# Altium PCB Mic Speaker Interconnect.PcbDoc
Units mm, origin at the board's own origin, x right, y up, seen from the top; angles counter-clockwise.
Board outline 17.6 x 15.81 mm, 2 copper layers (Top Layer, Bottom Layer), stack 1.621 mm thick; 8 components, 6 nets, 18 pads, 8 vias.
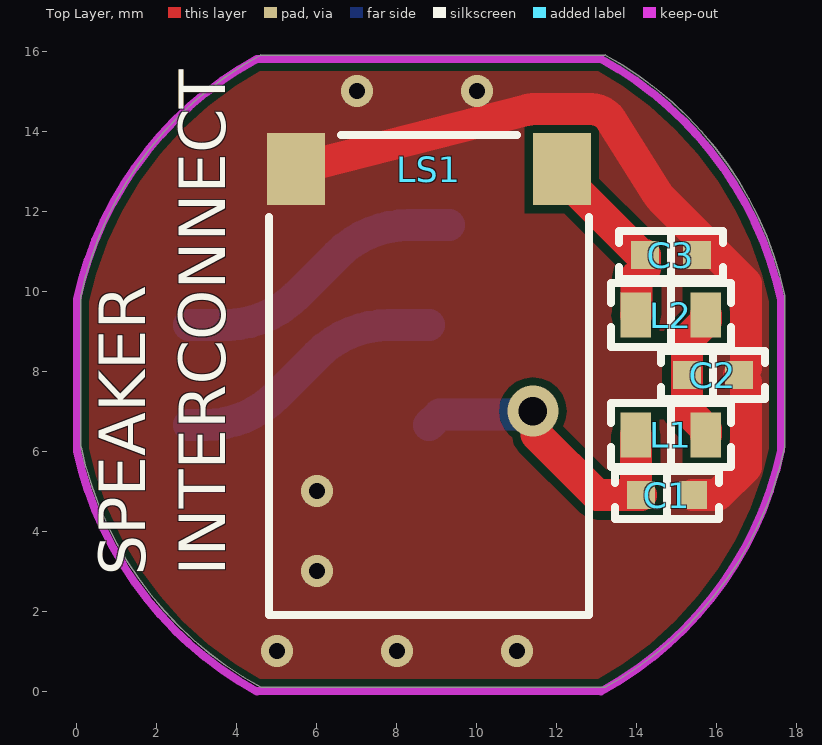
[diagram p0: Top Layer view]
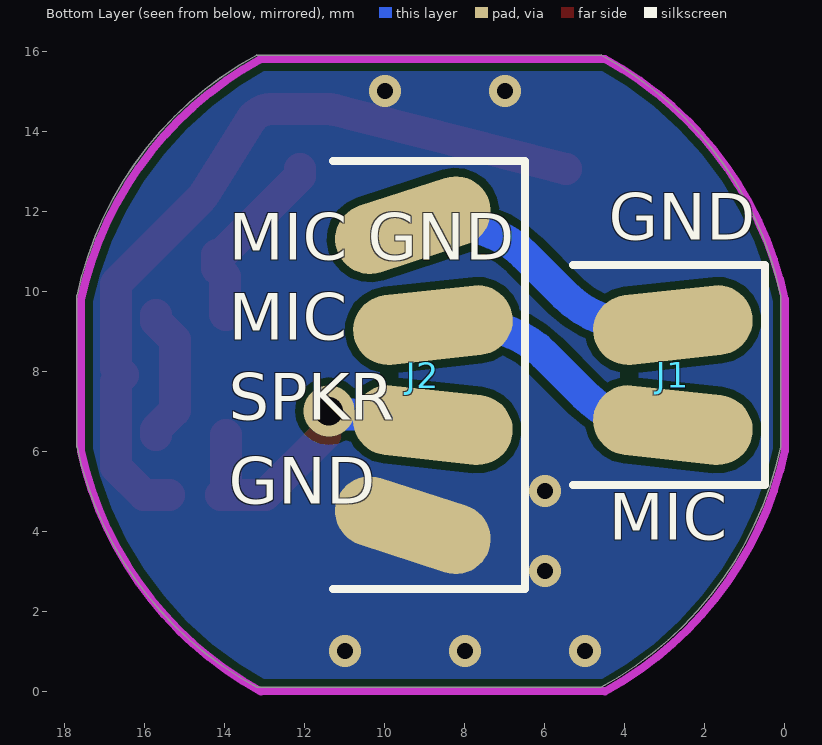
[diagram p1: Bottom Layer view, seen from below]
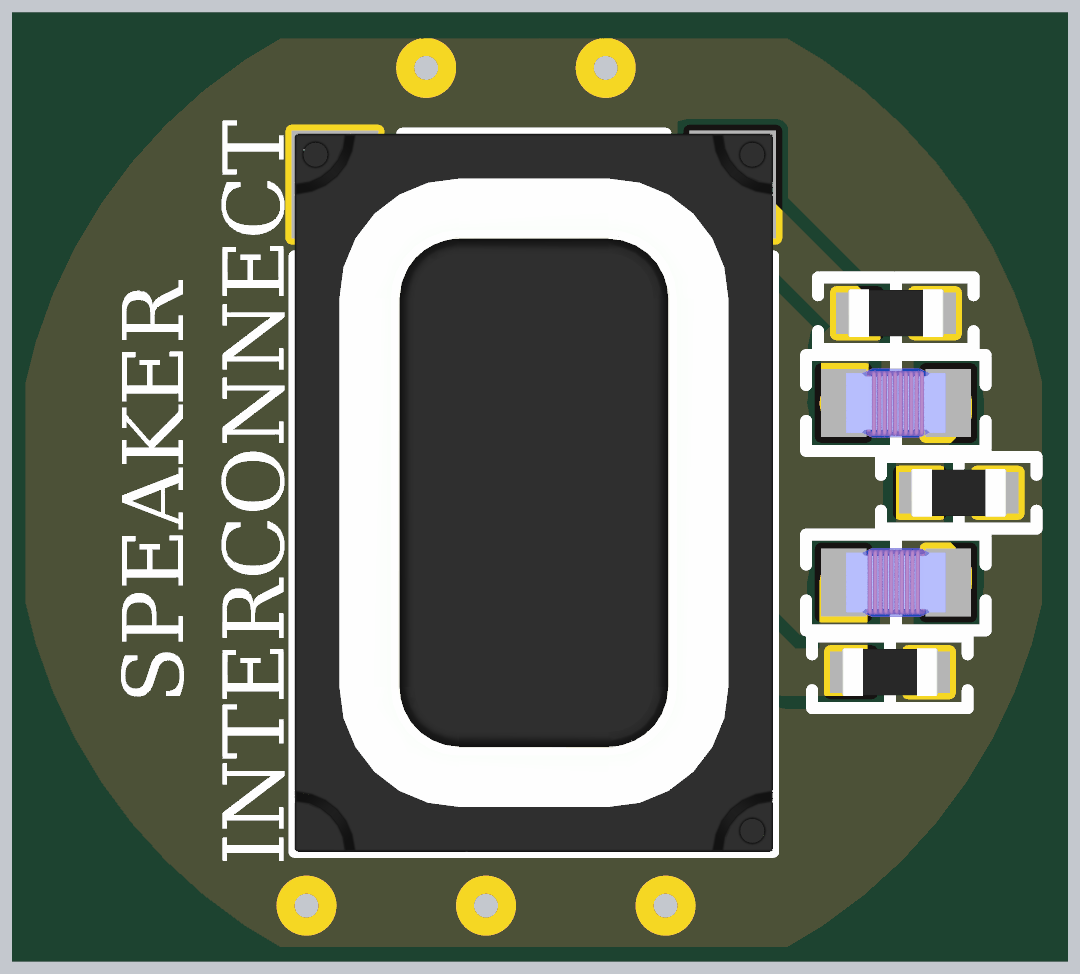
[diagram p2: 3D render of the assembled board from above, using the file's embedded part models]

## Layer stack, top to bottom
Top Solder: solder mask 0.0102, Solder Resist, Dk 3.5
Top Layer: signal copper 0.0356
Dielectric1: core 1.55, FR-4, Dk 4.8
Bottom Layer: signal copper 0.0356
Bottom Solder: solder mask 0.0102, Solder Resist, Dk 3.5

## Board outline
4.597,0.095 cw(c8.9,8) 0.103,6.101 0.1,6.1 0.1,9.9 0.103,9.899 cw(c8.9,8) 4.597,15.905 4.6,15.9 13.2,15.9 13.203,15.905 cw(c8.9,8) 17.697,9.899 17.7,9.9 17.7,6.1 17.697,6.101 cw(c8.9,8) 13.203,0.095 13.2,0.1

## Design rules (kind name [scope] priority, off if disabled: settings)
Clearance PadClearance [IsPad vs IsPad] p1: gap=0.2 ignorepadtopadclearanceinfootprint=FALSE except(0: Arc-Hole Track-Hole SMDPad-Hole THPad-Hole Via-Hole Fill-Hole Poly-Hole Region-Hole Text-Hole)
Clearance [All] p2: gap=0.2 ignorepadtopadclearanceinfootprint=FALSE except(0: Arc-Hole Track-Hole SMDPad-Hole THPad-Hole Via-Hole Fill-Hole Poly-Hole Region-Hole Text-Hole)
ComponentClearance [All] p1: gap=0.15 collisioncheckmode=3 verticalgap=0.254 showdistances=TRUE
HoleSize [All] p1: absolutevalues=TRUE maxlimit=6 minlimit=0.4 maxpercent=80.000 minpercent=20.000
HoleToHoleClearance [All] p1: gap=0.2 allowstackedmicrovias=TRUE
MinimumSolderMaskSliver [All] p1: minsoldermaskwidth=0
PolygonConnect ViaConnect [IsVia] p1: connectstyle=Direct reliefconductorwidth=0.254 reliefentries=4 polygonreliefangle="90 Angle" airgapwidth=0.254
PolygonConnect [All] p2: connectstyle=Direct reliefconductorwidth=0.3 reliefentries=4 polygonreliefangle="90 Angle" airgapwidth=0.254
RoutingVias [All] p1: holewidth=0.6 width=1 viastyle="Through Hole" minholewidth=0.4 minwidth=0.8 maxholewidth=5 maxwidth=6
SilkToSilkClearance [All] p1: silktosilkclearance=0
SilkToSolderMaskClearance SilkscreenOverComponentPads [IsPad] p1: minsilkscreentomaskgap=0.05 clearancetoexposedcopper=TRUE
SolderMaskExpansion "Via Tenting" [IsVia] p1: expansion=-2 istentingtop=FALSE
SolderMaskExpansion [All] p2: expansion=0.102 istentingtop=FALSE
Width [All] p1: maxlimit=2 minlimit=0.2 preferedwidth=0.4
24 further rules are at their usual default settings.

## Components (designator, comment, footprint, x,y, rotation, side; value= is the part's Value field where it differs from the comment)
C1 "680pF" "CAP FILM 0603_1608" 14.75,4.9 r180 top
C2 "560pF" "CAP FILM 0603_1608" 15.9,7.9 r180 top
C3 "120pF" "CAP FILM 0603_1608" 14.85,10.9 r180 top
J1 "2 Pin" Mic2Board 2.8,7.9 r180 bottom
J2 "4 Pad" Wire2Board 8.8,7.9 r180 bottom
L1 "43nH" "IND 0603_1608 RF WW" 14.85,6.4 r0 top
L2 "22nH" "IND 0603_1608 RF WW" 14.85,9.4 r180 top
LS1 "CMS-15113-078SP-67" "CUI CMS-15113-078SP" 8.8,7.9 r180 top

## Footprints (in the part's own frame and the unit in brackets; to place one, negate y for a bottom-side part, rotate by r counter-clockwise, add the part's x,y. Pads: shape width x height; smd on the part's side, far side on the other; paste and mask are expansions set on the pad)
"CAP FILM 0603_1608" [mm] "Chip Capacitor, 2-Leads, Body 1.60x0.80mm, IPC Medium Density"
  rect 0.7x0.7 smd: 1(-0.65,0) 2(0.65,0)
  silkscreen extent -1.3,-0.6 1.3,0.6, body extent -0.8,-0.4 0.8,0.4, height 0.7
"CUI CMS-15113-078SP" [mm] "2 Pads, 12.00 x 8.00 mm Body ,   8 Ohms General Purpose Speaker 250mW 100Hz ~ 10kHz Top Rectangular 63dB"
  rect 1.45x1.8 smd: +(-3.325,-5.15) -(3.325,-5.15)
  silkscreen extent -4,-6 4,6, body extent -4,-6 4,6, height 2.83
"IND 0603_1608 RF WW" [mm] "Chip Inductor, 2-Leads, Body 1.65x0.99mm, IPC Medium Density"
  rect 0.76x1.13 smd: 1(-0.875,0) 2(0.875,0)
  silkscreen extent -1.5,-0.8 1.5,0.8, body extent -0.84,-0.58 0.83,0.58, height 1
Mic2Board [mm]
  oval 4x1.75 smd rot 6.25: 1(0,1.25)
  oval 4x1.75 smd rot 173.75: 2(0,-1.25)
  silkscreen extent -2.5,-2.75 2.3,2.75
Wire2Board [mm]
  oval 4x1.75 smd rot 18: 1(-0.5,3.75)
  oval 4x1.75 smd rot 6.25: 2(0,1.25)
  oval 4x1.75 smd rot 173.75: 3(0,-1.25)
  oval 4x1.75 smd rot 162: 4(-0.5,-3.75)
  silkscreen extent -2.5,-5.35 2.3,5.35

## Part data
C1: library part ECH-U1C681GX5, "CAP FILM 680PF 2% 16VDC 0603", Device Package="0603 (1608 Metric)", Dielectric Material="Polyphenylene Sulfide (PPS), Metallized - Stacked", Manufacturer="Panasonic Electronic Components", Operating Temperature="-55°C ~ 125°C", Supplier Part Number 1=PCF1451CT-ND, Tolerance=±2%, Voltage Rating - DC=16V, Applications="General Purpose", Capacitance=680pF, ComponentLink1Description=Datasheet, ComponentLink1URL=http://industrial.panasonic.com/www-cgi/jvcr13pz.cgi?E+PZ+3+ABD0013+ECHU1C681GX5+7+WW, ComponentLink2Description="DigiKey Link", ComponentLink2URL=http://digikey.com/product-detail/en/panasonic-electronic-components/ECH-U1C681GX5/PCF1451CT-ND/431710, Height - Seated (Max)="0.033\" (0.85mm)", LastUpdated="06/09/2020 12:17:15", Lifecycle Status=Active, Minimum Order=1, Mounting Type="Surface Mount", Package / Case="0603 (1608 Metric)", Packaging=TapeAndReel, Part Number=ECH-U1C681GX5, Part Status=Active, Price=0.11, Series=ECH-U(X), Size / Dimension="0.063\" L x 0.031\" W (1.60mm x 0.80mm)", Supplier 1=DigiKey, Termination="Solder Pads"
C2: library part ECH-U1C561JX5, "CAP FILM 560PF 5% 16VDC 0603", Device Package="0603 (1608 Metric)", Dielectric Material="Polyphenylene Sulfide (PPS), Metallized - Stacked", Manufacturer="Panasonic Electronic Components", Operating Temperature="-55°C ~ 125°C", Supplier Part Number 1=PCF1468CT-ND, Tolerance=±5%, Voltage Rating - DC=16V, Applications="General Purpose", Capacitance=560pF, ComponentLink1Description=Datasheet, ComponentLink1URL=http://industrial.panasonic.com/www-cgi/jvcr13pz.cgi?E+PZ+3+ABD0013+ECHU1C561JX5+7+WW, ComponentLink2Description="DigiKey Link", ComponentLink2URL=http://digikey.com/product-detail/en/panasonic-electronic-components/ECH-U1C561JX5/PCF1468CT-ND/431709, Height - Seated (Max)="0.033\" (0.85mm)", LastUpdated="06/09/2020 12:17:15", Lifecycle Status=Active, Minimum Order=1, Mounting Type="Surface Mount", Package / Case="0603 (1608 Metric)", Packaging=TapeAndReel, Part Number=ECH-U1C561JX5, Part Status=Active, Price=0.12, Series=ECH-U(X), Size / Dimension="0.063\" L x 0.031\" W (1.60mm x 0.80mm)", Supplier 1=DigiKey, Termination="Solder Pads"
C3: library part ECH-U1C121JX5, "CAP FILM 120PF 5% 16VDC 0603", Device Package="0603 (1608 Metric)", Dielectric Material="Polyphenylene Sulfide (PPS), Metallized - Stacked", Manufacturer="Panasonic Electronic Components", Operating Temperature="-55°C ~ 125°C", Supplier Part Number 1=PCF1460CT-ND, Tolerance=±5%, Voltage Rating - DC=16V, Applications="General Purpose", Capacitance=120pF, ComponentLink1Description=Datasheet, ComponentLink1URL=http://industrial.panasonic.com/www-cgi/jvcr13pz.cgi?E+PZ+3+ABD0013+ECHU1C121JX5+7+WW, ComponentLink2Description="DigiKey Link", ComponentLink2URL=http://digikey.com/product-detail/en/panasonic-electronic-components/ECH-U1C121JX5/PCF1460CT-ND/431693, Height - Seated (Max)="0.033\" (0.85mm)", LastUpdated="06/09/2020 12:17:15", Lifecycle Status=Active, Minimum Order=1, Mounting Type="Surface Mount", Package / Case="0603 (1608 Metric)", Packaging=TapeAndReel, Part Number=ECH-U1C121JX5, Part Status=Active, Price=0.11, Series=ECH-U(X), Size / Dimension="0.063\" L x 0.031\" W (1.60mm x 0.80mm)", Supplier 1=DigiKey, Termination="Solder Pads"
J2: library part "4 Pin"
L1: library part LQW18AN43NJ8ZD, "FIXED IND 43NH 840MA 210 MOHM", Current Rating (Amps)=840mA, DC Resistance (DCR)="210mOhm Max", Device Package="0603 (1608 Metric)", Frequency - Self Resonant=2.78GHz, Inductance Frequency - Test=100MHz, Manufacturer="Murata Electronics", Operating Temperature="-55°C ~ 125°C", Q @ Freq="40 @ 250MHz", Ratings=AEC-Q200, Supplier Part Number 1=490-15692-1-ND, Tolerance=±5%, ComponentLink1Description=Datasheet, ComponentLink1URL=https://search.murata.co.jp/Ceramy/image/img/P02/JELF243A-9133.pdf, ComponentLink2Description="DigiKey Link", ComponentLink2URL=http://digikey.com/product-detail/en/murata-electronics/LQW18AN43NJ8ZD/490-15692-1-ND/6800357, Height - Seated (Max)="0.039\" (1.00mm)", Inductance=43nH, LastUpdated="06/09/2020 11:05:19", Lifecycle Status=Active, Material - Core=Non-Magnetic, Minimum Order=1, Mounting Type="Surface Mount", Package / Case="0603 (1608 Metric)", Packaging=TapeAndReel, Part Number=LQW18AN43NJ8ZD, Part Status=Active, PartId=1154, Price=0.09, Series=LQW18, Shielding=Unshielded, Size / Dimension="0.063\" L x 0.031\" W (1.60mm x 0.80mm)", Supplier 1=DigiKey, Supplier Device Package="0603 (1608 Metric)", Type=Wirewound
L2: library part LQW18AN22NG8ZD, "FIXED IND 22NH 1.3A 86 MOHM", Current Rating (Amps)=1.3A, DC Resistance (DCR)="86mOhm Max", Device Package="0603 (1608 Metric)", Frequency - Self Resonant=3.45GHz, Inductance Frequency - Test=100MHz, Manufacturer="Murata Electronics", Operating Temperature="-55°C ~ 125°C", Q @ Freq="40 @ 250MHz", Ratings=AEC-Q200, Supplier Part Number 1=490-15658-1-ND, Tolerance=±2%, ComponentLink1Description=Datasheet, ComponentLink1URL=https://search.murata.co.jp/Ceramy/image/img/P02/JELF243A-9133.pdf, ComponentLink2Description="DigiKey Link", ComponentLink2URL=http://digikey.com/product-detail/en/murata-electronics/LQW18AN22NG8ZD/490-15658-1-ND/6800323, Height - Seated (Max)="0.039\" (1.00mm)", Inductance=22nH, LastUpdated="06/09/2020 11:05:20", Lifecycle Status=Active, Material - Core=Non-Magnetic, Minimum Order=1, Mounting Type="Surface Mount", Package / Case="0603 (1608 Metric)", Packaging=TapeAndReel, Part Number=LQW18AN22NG8ZD, Part Status=Active, PartId=1273, Price=0.10, Series=LQW18, Shielding=Unshielded, Size / Dimension="0.063\" L x 0.031\" W (1.60mm x 0.80mm)", Supplier 1=DigiKey, Supplier Device Package="0603 (1608 Metric)", Type=Wirewound
LS1: "SPEAKER, 15 X 11 MM, 3 MM DEEP,", Frequency - Self Resonant=700Hz, Frequency Range="100Hz ~ 20kHz", Manufacturer="CUI Devices", Power - Max=1W, Power - Rated=700mW, Supplier Part Number 1=102-5001-ND, ComponentLink1Description=Datasheet, ComponentLink1URL=https://www.cuidevices.com/product/resource/digikeypdf/cms-15113-078x-67.pdf, ComponentLink2Description="DigiKey Link", ComponentLink2URL=http://digikey.com/product-detail/en/cui-devices/CMS-15113-078SP-67/102-5001-ND/9561103, Efficiency - dBA=91.00, Efficiency - Testing=700mW/100mm, Efficiency - Type="Sound Pressure Level (SPL)", Height - Seated (Max)="0.118\" (3.00mm)", Impedance="8 Ohms", Ingress Protection="IP67 - Dust Tight, Waterproof", LastUpdated="06/09/2020 11:52:13", Lifecycle Status=Active, Material - Cone="Polyester, Polyethylene Terephthalate (PET)", Material - Magnet=Nd-Fe-B, Minimum Order=1, Packaging=Tray, Part Number=CMS-15113-078SP-67, Part Status=Active, Port Location=Top, Price=2.17, Series=CMS, Shape=Rectangular, Size / Dimension="0.591\" L x 0.433\" W (15.00mm x 11.00mm)", Supplier 1=DigiKey, Technology=Magnetic, Termination="Solder Pads", Type="General Purpose"

## Via types
v1: diameter 0.8, hole 0.4, Top Layer to Bottom Layer, 7 vias
v2: diameter 1.27, hole 0.711, Top Layer to Bottom Layer, 1 vias

## Nets (pads, with @x,y where several pads share a name; then routed paths per layer and width w, separated by ;. In a path a pad name is that pad's centre, name@x,y a point inside that pad or via, vN(x,y) a via of type N, cw(c..) or ccw(c..) an arc to the next point about the centre after c; other vN are vias at no path point)
GND: C1.1 C2.1 C3.1 J2.4 LS1.- | length 19.8
  Top Layer w0.8: LS1.- 11.251,14.531 cw(c11.4,13.95) 11.4,14.55 12.85,14.55 cw(c12.85,13.95) 13.359,14.268 14.5,12.448 ccw(c15.177,12.872) 14.612,12.306 16.725,10.194 16.725,8.075 C2.1 16.725,7.725 16.725,5.606 16.019,4.9 C1.1
  other v1: 5,1 8,1 11,1 6,3 6,5 7,15 10,15
GND_MIC: J1.1 J2.1 | length 7.3
  Bottom Layer w0.8: J1.1 3.698,9.15 ccw(c3.698,11.69) 3.798,9.152 ccw(c3.698,11.69) 5.494,9.894 6.506,10.906 cw(c8.302,9.11) 8.302,11.65 J2.1
MIC: J1.2 J2.2 | length 6.8
  Bottom Layer w0.8: J1.2 3.198,6.65 ccw(c3.198,9.19) 4.403,6.954 ccw(c3.198,9.19) 4.994,7.394 6.006,8.406 cw(c7.802,6.61) 7.802,9.15 J2.2
NetC2_2: C2.2 L1.2 L2.1 | length 3.4
  Top Layer w0.8: L1.2 15.725,6.545 15.25,7.02 C2.2 15.25,8.78 15.725,9.255 L2.1
SPKR_FILTOUT: C3.2 L2.2 LS1.+ | length 4.7
  Top Layer w0.8: LS1.+ 12.125,12.875 14.1,10.9 C3.2 14.2,10.57 13.995,10.365 13.995,9.42 L2.2
SPKR_IN: C1.2 J2.3 L1.1 | length 8.2
  Top Layer w0.8: v2(11.4,7) 11.49,6.91 11.49,6.41 13,4.9 C1.2 13.975,5.025 L1.1
  Bottom Layer w0.8: J2.3 9.06,6.91 11.31,6.91 v2(11.4,7)

## Polygon pours and split planes (outlines as drawn)
GND on Bottom Layer "GND_L02_P000" (solid, remove dead copper, pour order 0): 4.497,15.805 13.103,15.805 14.4,15 16,13.3 17.3,11 17.6,9.8 17.597,6.001 17,4.2 16.1,2.6 14.4,0.8 13.1,0 4.497,-0.005 3,1 1.2,3 0.3,5 0.003,6.001 0,9.8 0.7,12 2.2,14.1 3.4,15.1
GND on Top Layer "GND_L01_P001" (solid, remove dead copper, pour order 1): 4.497,15.805 13.103,15.805 14.4,15 16,13.3 17.3,11 17.6,9.8 17.597,6.001 17,4.2 16.1,2.6 14.4,0.8 13.1,0 4.497,-0.005 3,1 1.2,3 0.3,5 0.003,6.001 0,9.8 0.7,12 2.2,14.1 3.4,15.1

## Keep-outs
Keep-Out Layer:
  lines w0.2: 0,6 0,9.8 ; 0.003,6.001 ccw(c8.8,7.9) 4.497,-0.005 ; 0.003,9.799 cw(c8.8,7.9) 4.497,15.805 ; 4.5,0 13.1,0 ; 4.5,15.8 13.1,15.8 ; 13.103,-0.005 ccw(c8.8,7.9) 17.597,6.001 ; 13.103,15.805 cw(c8.8,7.9) 17.597,9.799 ; 17.6,6 17.6,9.8

## Silkscreen, mask and mechanical layers (free items; w line width, h text height)
Top Overlay:
  text "SPEAKER / INTERCONNECT" at 4.1,2.89 h2 r90
Bottom Overlay:
  text "GND" at 4.4,10.9 h2
  text "MIC GND" at 13.9,10.4 h2
  text "MIC" at 13.9,8.4 h2
  text "SPKR" at 13.9,6.4 h2
  text "GND" at 13.9,4.3 h2
  text "MIC" at 4.4,3.4 h2